# Altium PCB CAN-to-CAN.PcbDoc (part 1 of 2)
Units mil, origin at the board's own origin, x right, y up, seen from the top; angles counter-clockwise.
Board outline 4494 x 3585 mil, 4 copper layers (Top Layer, +5V, GND, Bottom Layer), stack 23.756 mil thick; 112 components, 87 nets, 365 pads, 245 vias.
Unrouted connection lines stored in the file: 3.
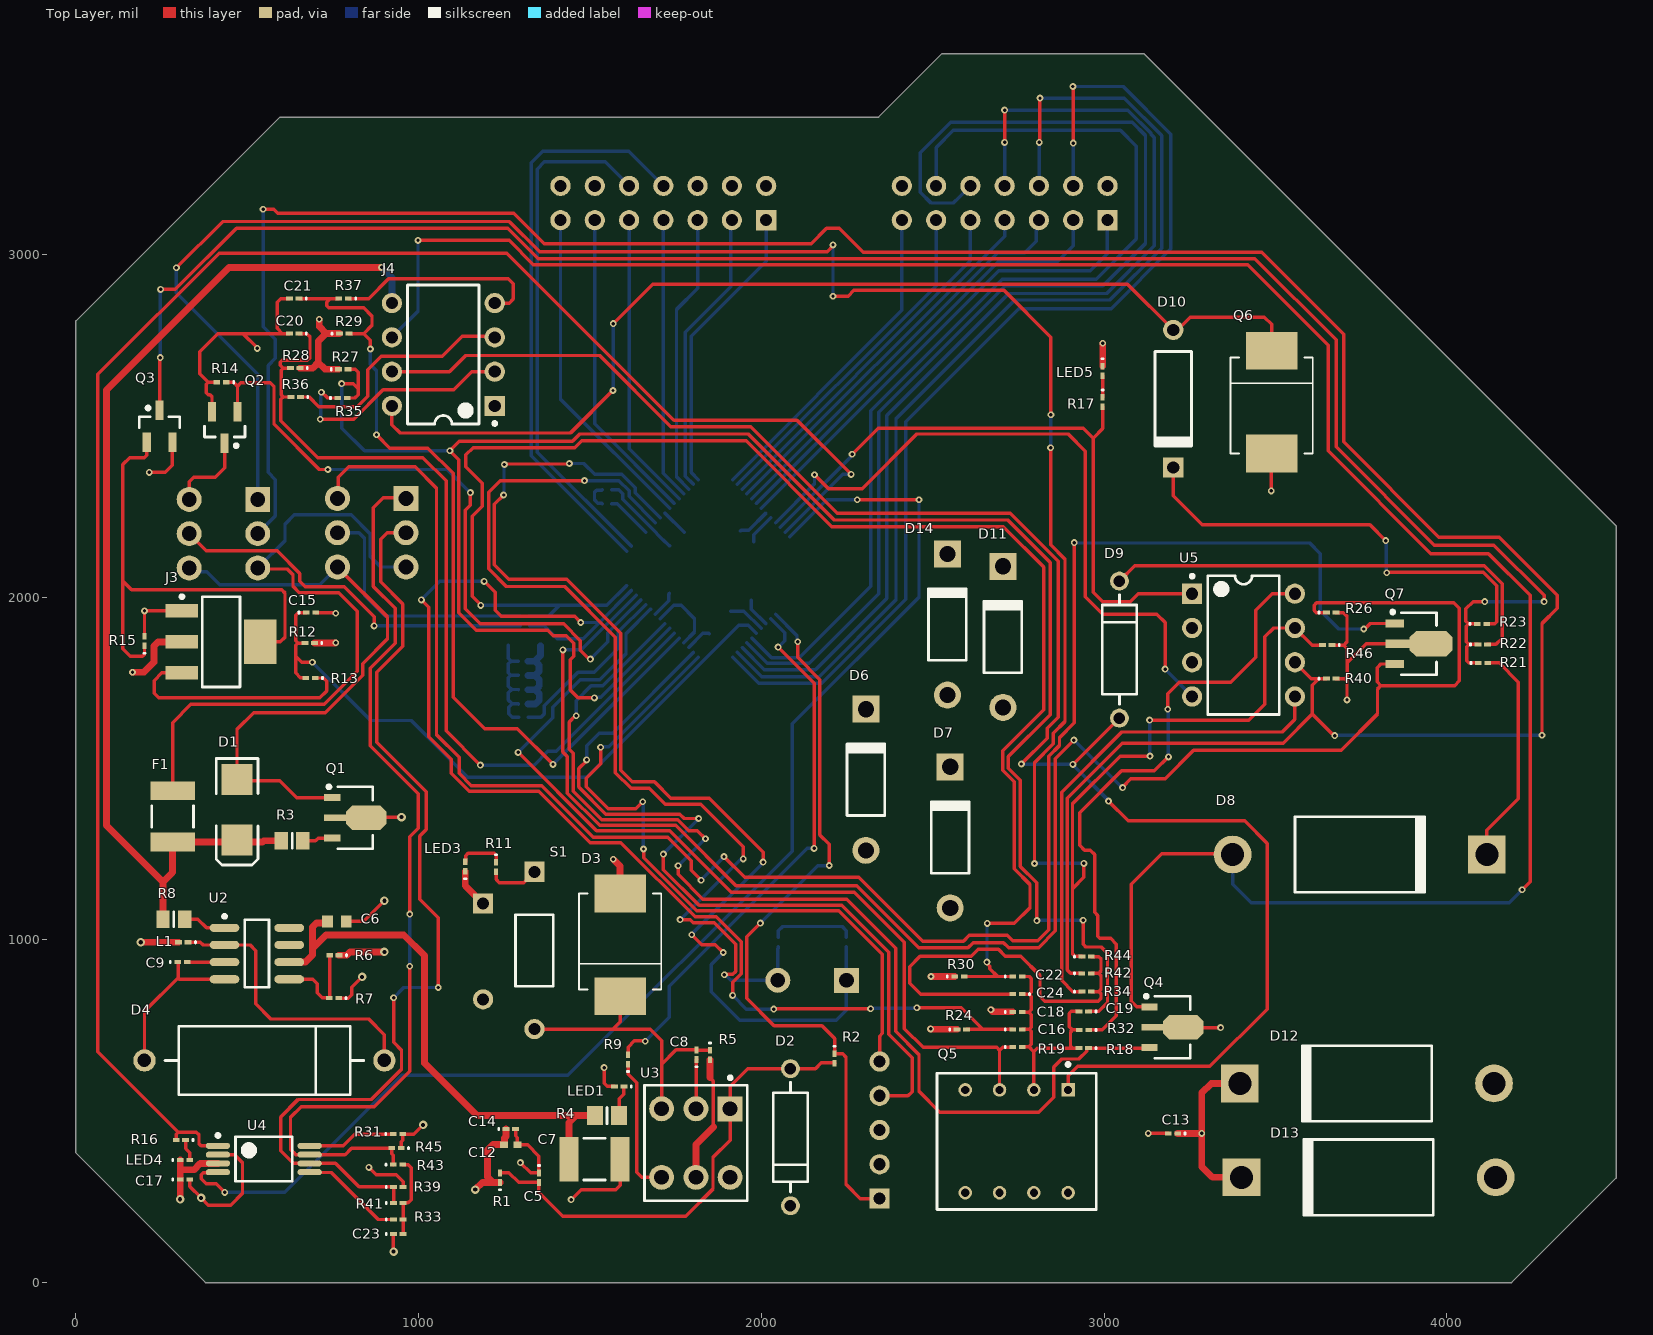
[diagram p0: Top Layer view]
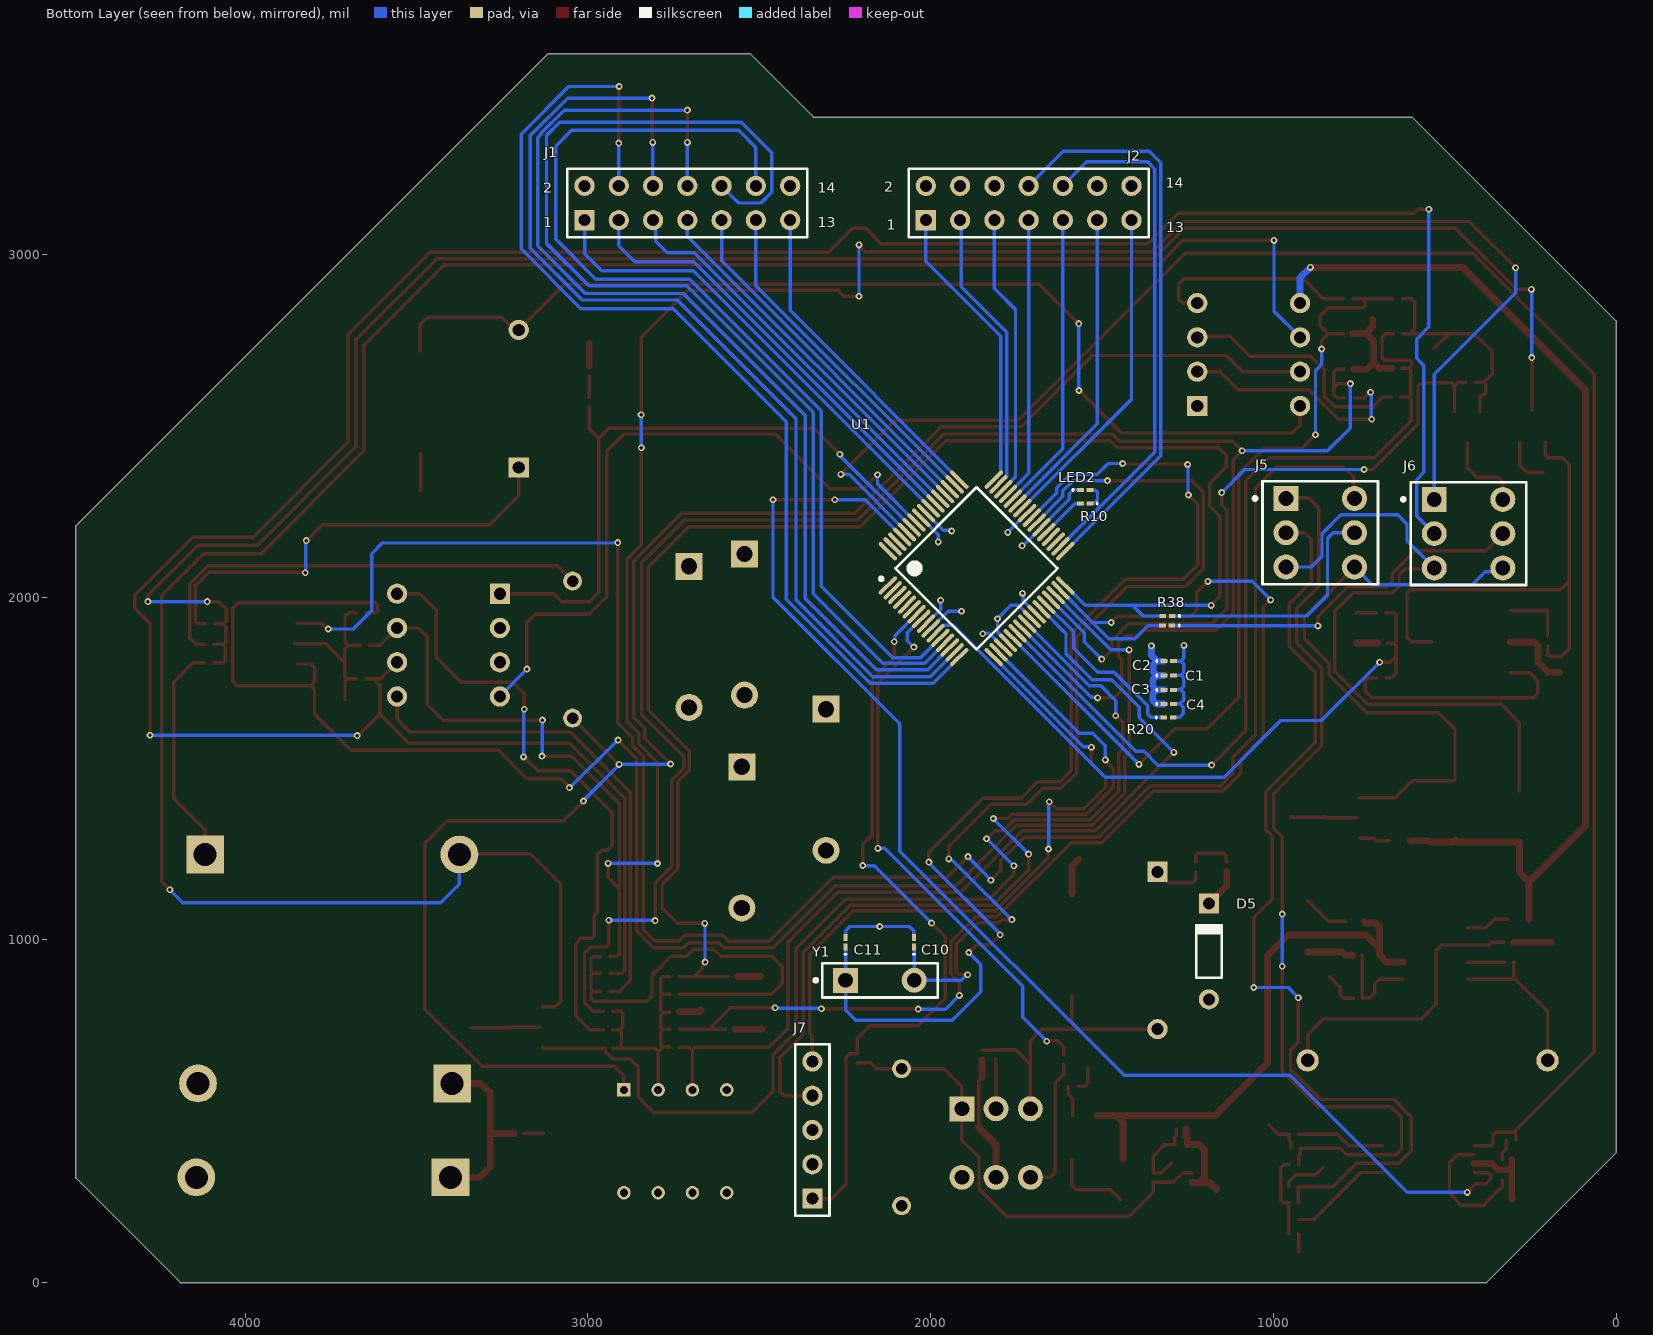
[diagram p1: Bottom Layer view, seen from below]
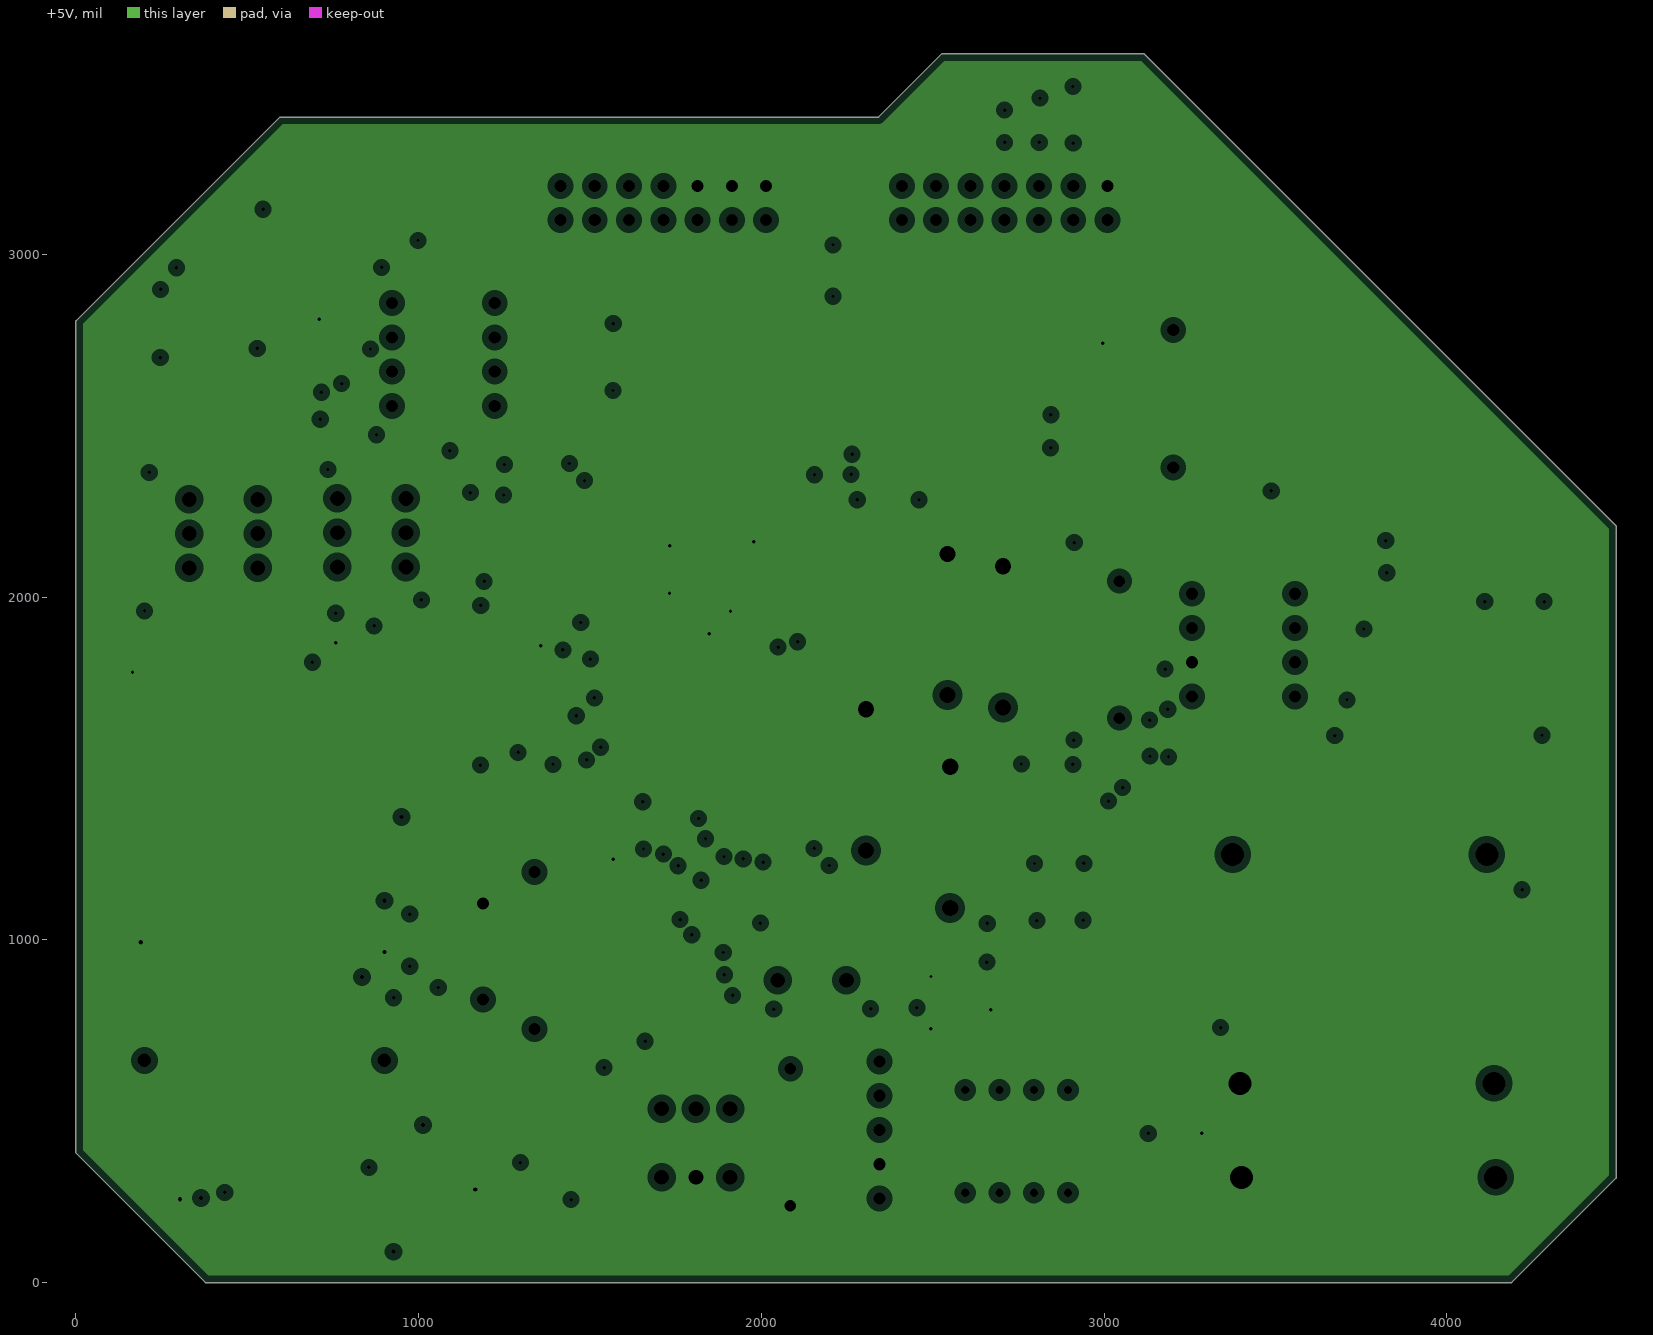
[diagram p2: +5V, clearances drawn from the general rule]
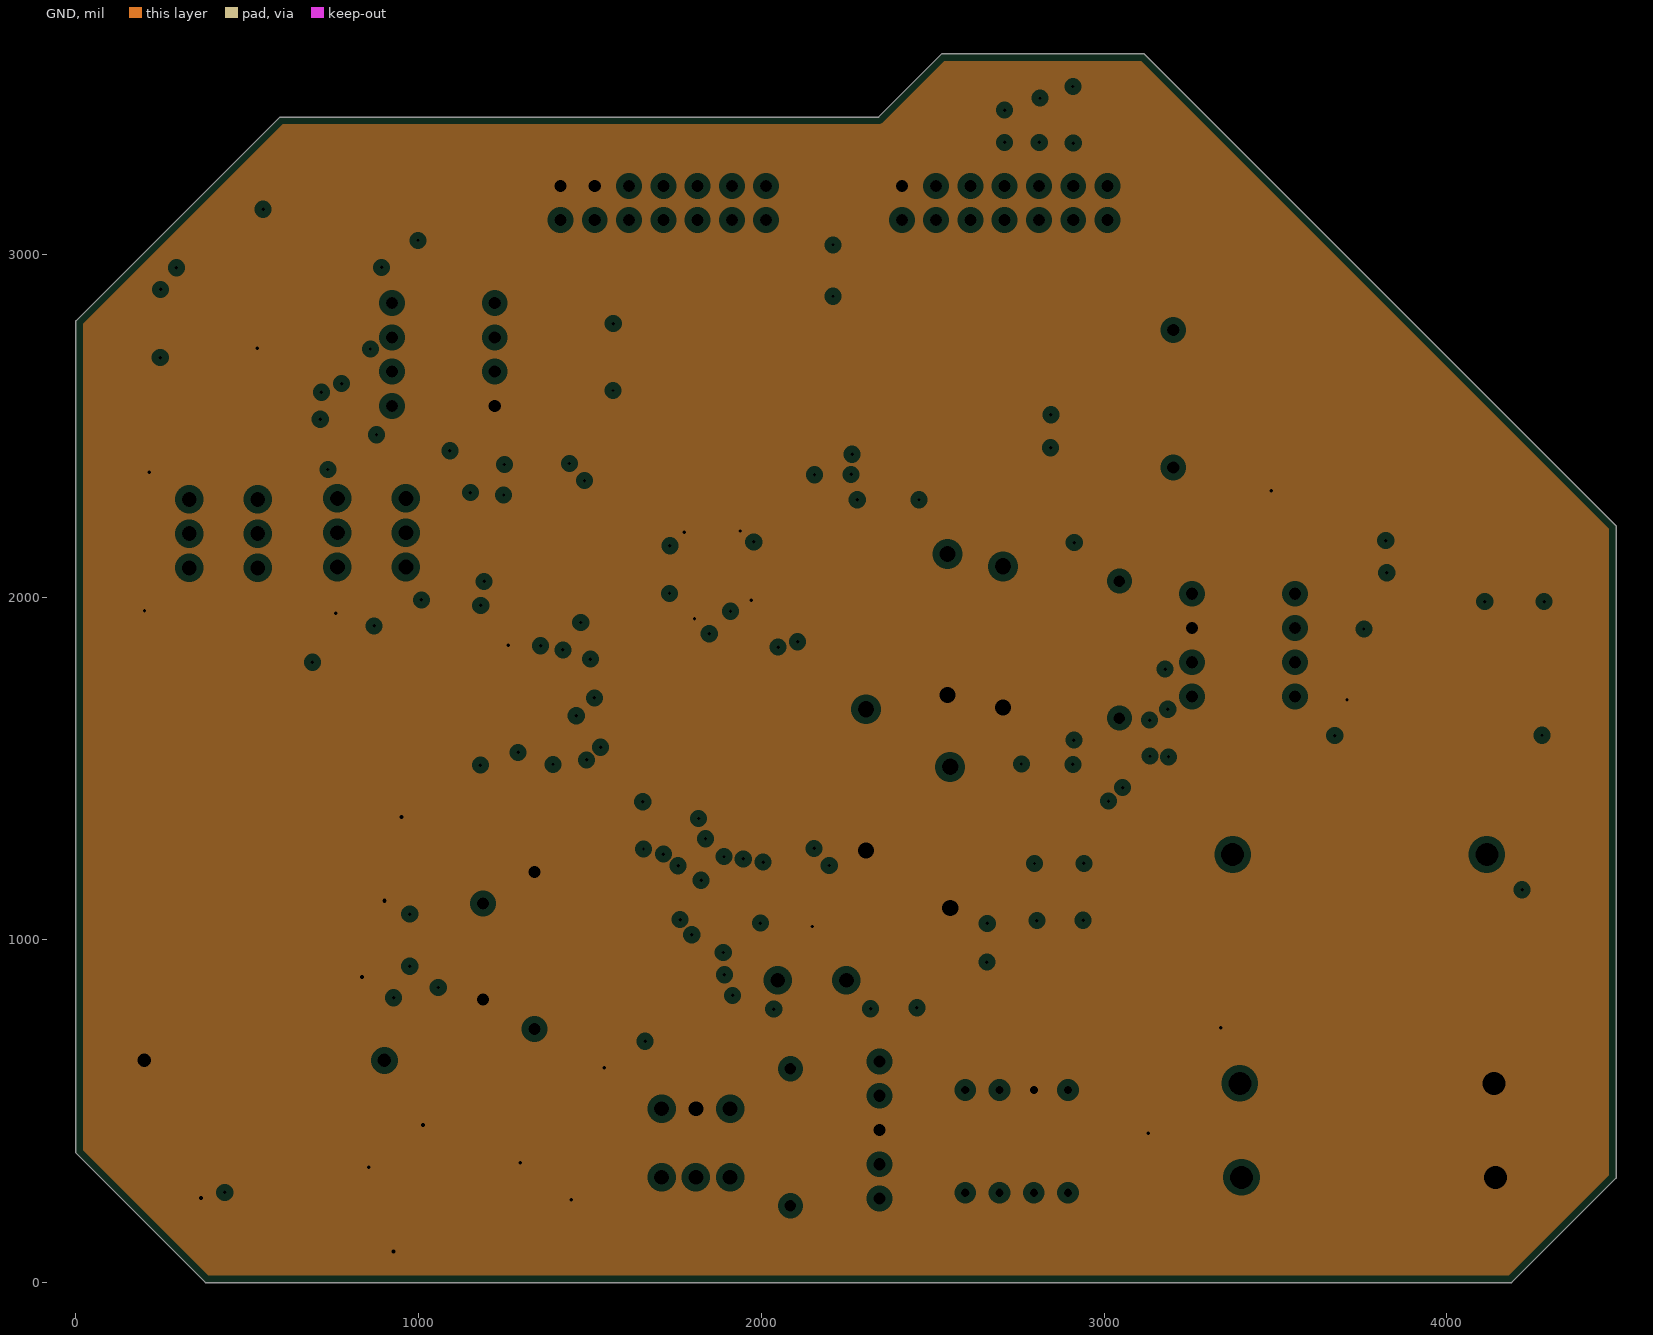
[diagram p3: GND, clearances drawn from the general rule]

## Layer stack, top to bottom
Top Solder: solder mask 0.4, Solder Resist, Dk 3.5
Top Layer: signal copper 1.4
Dielectric 2: prepreg 2.8, PP-006, Dk 4.1
+5V: plane copper 1.378, net +5V
Dielectric 1: dielectric 12.6, FR-4, Dk 4.8
GND: plane copper 1.378, net GND
Dielectric 3: prepreg 2.8, PP-006, Dk 4.1
Bottom Layer: signal copper 1.4
Bottom Solder: solder mask 0.4, Solder Resist, Dk 3.5

## Board outline
378,0 0,378 0,2806 595,3401 2342,3401 2526,3585 3117,3585 3546,3156 4494,2208 4494,305 4189,0

## Design rules (kind name [scope] priority, off if disabled: settings)
Clearance [All] p1: gap=6 ignorepadtopadclearanceinfootprint=FALSE
PlaneClearance [All] p1: clearance=20
PlaneConnect [All] p1: planeconnectstyle=Relief reliefexpansion=20 reliefentries=4 reliefconductorwidth=10 reliefairgap=10
PolygonConnect [All] p1: connectstyle=Relief reliefconductorwidth=10 reliefentries=4 polygonreliefangle="90 Angle" airgapwidth=10
RoutingVias [All] p1: holewidth=12 width=25 viastyle="Through Hole" minholewidth=10 minwidth=20 maxholewidth=25 maxwidth=50
SolderMaskExpansion [All] p1: expansion=4 istentingtop=FALSE
Width [All] p1: maxlimit=20 minlimit=5 preferedwidth=10
28 further rules are at their usual default settings.

## Components (designator, comment, footprint, x,y, rotation, side; value= is the part's Value field where it differs from the comment)
C1 "100n" 0603 1305.22,1771.33 r180 bottom
C2 "100n" 0603 1305.22,1813 r180 bottom
C3 "100n" 0603 1305.22,1729.67 r180 bottom
C4 "100n" 0603 1305.22,1688 r180 bottom
C5 "100n" 0603 1351,306 r270 top
C6 "10u/16" 1608[0603] 761.44,1053 r0 top value=470u/16
C7 "100n" 1812 1513.2,360 r0 top
C8 "10n" 0603 1811,664.78 r90 top value=100pF
C9 "100p" 0603 311,935 r0 top value=100pF
C10 "27p" 0603 2049,993 r90 bottom value=100n
C11 "27p" 0603 2248,993 r90 bottom value=100n
C12 "100u/6V3" 0402 1268.31,402 r0 top value=470u/16
C13 "100n" 0603 3201,435 r180 top
C14 "100n" 0603 1269,448 r0 top
C15 "100n" 0603 686,1955 r0 top
C16 "100n" 0603 2747.53,738.5 r0 top
C17 "100n" 0603 317.97,300 r0 top
C18 "100n" 0603 2747.53,790 r0 top
C19 "100n" 0603 2941,791 r180 top
C20 "100n" 0603 636.94,2769 r180 top
C21 "100n" 0603 637,2871 r180 top
C22 "100n" 0603 2747.53,893 r0 top
C23 "4n7" 0603 940.66,142 r0 top value=100n
C24 "4n7" 0603 2747.22,841.5 r180 top value=100n
D1 "P6SMB15A" SMB 470,1379.58 r270 top
D2 "LL4148" DIODE-0.4 2085,424 r270 top
D3 "LL4448" DIODE_SMC 1588,985 r90 top
D4 "LL5817" DIODE-0.7 550,648 r0 top
D5 "BAT54S" DO-35 1188,966 r90 bottom
D6 "BAT54S" DO-41 2305,1467 r90 top
D7 "BAT54S" DO-204AL 2551,1299 r90 top
D8 "LL4148" DO-201AD 3746,1249 r0 top
D9 "LL4148" DIODE-0.4 3045,1847 r90 top
D10 "LL4148" DO-7 3202,2579 r270 top
D11 "BAT54S" DO-41 2705,1884 r90 top
D12 "BAT54S" DO-201AD 3767,581 r180 top
D13 "BAT54S" DO-201AD 3772,307 r180 top
D14 "BAT54S" DO-41 2543,1920 r90 top
F1 "Fuse 1" 1812 282,1360.2 r270 top
J1 "Header 7X2" HDR2X7 3009.98,3100 r180 bottom
J2 "Header 7X2" HDR2X7 2014,3100 r180 bottom
J3 "MX-43045-0400" SOT223_N 423.42,1869.52 r0 top
J4 "MX-43045-0800" DIP-8 1072,2708 r180 top
J5 "MX-43045-0600" DPDT-6 863,2188 r180 bottom
J6 "MX-43045-0600" DPDT-6 430.44,2185.19 r180 bottom
J7 "ZL201" HDR1X5 2345,245 r90 bottom
L1 "DL22-330" 0603 313.22,993 r180 top value=100uH
LED1 "HCL-1904AYL" 0603 1585.22,572 r180 top
LED2 "HCL-1906BR1" 0603 1549,2313 r180 bottom
LED3 "HCL-1903BG4" 0603 1136,1213.78 r90 top
LED4 "HCL-1904AYL" 0603 317.97,358 r0 top
LED5 "HCL-1906BR1" 0603 2996,2660 r270 top
Q1 "BSS138" SOT89L 815,1356 r0 top
Q2 "BSS123" SOT23_M 434,2495 r270 top
Q3 "BSS123" SOT23_M 244,2498.74 r90 top
Q4 "BSS123" SOT89L 3199.93,745.06 r0 top
Q5 "BSS123" DIP-P8 2745,412 r180 top
Q6 "BSS123" DIODE_SMC 3489,2569 r270 top
Q7 "BSS123" SOT89N 3919,1864 r0 top
R1 "4k7" 0603 1238,306 r90 top value=1K
R2 "4k7" 0603 2214,654 r270 top value=1K
R3 "1M" 6-0805_L 631,1289 r0 top value=1K
R4 "4k7" 6-0805_N 1549.57,487 r0 top value=1K
R5 "10k" 0603 1850,663.78 r270 top value=1K
R6 "3k6 1%" 0603 754,955 r180 top value=1K
R7 "1k2 1%" 0603 752.78,830 r180 top value=1K
R8 "1R" 6-0805_L 285.5,1060 r180 top value=1K
R9 "nc" 0603 1611,651 r90 top value=1K
R10 "1k8" 0603 1549,2273 r0 bottom value=1K
R11 "1k8" 0603 1226,1212.56 r270 top value=1K
R12 "10k" 0603 682.22,1866 r180 top value=1K
R13 "470" 0603 684.22,1764 r180 top value=1K
R14 "4k7" 0603 424.78,2627 r180 top value=1K
R15 "4k7" 0603 200,1872 r90 top value=1K
R16 "4k7" 0603 306.22,416 r180 top value=1K
R17 "4k7" 0603 2996,2569.22 r270 top value=1K
R18 "4k7" 0603 2941,684 r180 top value=1K
R19 "4k7" 0603 2747.53,687 r0 top value=1K
R20 "4k7" 0603 1306,1649 r180 bottom value=1K
R21 "10k" 0603 4106,1808 r0 top value=1K
R22 "10k" 0603 4105,1862 r0 top value=1K
R23 "10k" 0603 4103,1922 r0 top value=1K
R24 "10k" 0603 2585,739 r0 top value=1K
R25 "1k" 0603 1310,1917 r0 bottom value=1K
R26 "4k7" 0603 3662.78,1955 r0 top value=1K
R27 "10k" 0603 780,2665 r0 top value=1K
R28 "10k" 0603 639.78,2668 r180 top value=1K
R29 "10k" 0603 782.84,2769 r0 top value=1K
R30 "10k" 0603 2578,893 r0 top value=1K
R31 "1k" 0603 939.66,433 r0 top value=1K
R32 "1k" 0603 2941.22,737 r180 top value=1K
R33 "nc" 0603 940.66,184 r0 top value=1K
R34 "nc" 0603 2949.22,849 r0 top value=1K
R35 "1k" 0603 778,2581 r0 top value=1K
R36 "1k" 0603 641.22,2584 r180 top value=1K
R37 "1k" 0603 780.78,2871 r180 top value=1K
R38 "1k" 0603 1309,1945 r0 bottom value=1K
R39 "CAN0001" 0603 940.66,279 r0 top
R40 "CAN0001" 0603 3662.78,1762 r0 top
R41 "68" 0603 940.66,232 r0 top value=1K
R42 "68" 0603 2949,902 r0 top value=1K
R43 "68" 0603 940,344 r0 top value=1K
R44 "68" 0603 2949.22,951 r0 top value=1K
R45 "CAN0001" 0603 935.22,392 r180 top
R46 "CAN0001" 0603 3651.03,1860 r180 top
S1 "DTSM32NB" PIN-W2/E2.8 1338,969 r270 top
U1 "PIC30F5011" ST-64-2_N 1866,2084 r135 bottom
U2 "MC33063AD" SO8_N 528,960 r0 top
U3 "MCP1320-46LT" DPDT-6 1809,407 r270 top
U4 "MCP2551-I/SN" DB008_L 548.14,360.39 r0 top
U5 "MCP2551-I/SN" DIP-8 3407,1860 r0 top
Y1 "10MHz" SPST-2 2148,882 r180 bottom

## Footprints (in the part's own frame and the unit in brackets; to place one, negate y for a bottom-side part, rotate by r counter-clockwise, add the part's x,y. Pads: shape width x height; smd on the part's side, far side on the other; paste and mask are expansions set on the pad)
6-0805_L [mm] "Chip Resistor, Body 2.0x1.2mm, IPC High Density"
  rect 1x1.3 smd: 1(-0.8,0) 2(0.8,0)
  silkscreen extent 0,-0.55 0,0.55, body extent -1.07,-0.7 1.07,0.7, height 0.7
6-0805_N [mm] "Chip Resistor, Body 2.0x1.2mm, IPC Medium Density"
  rect 1.2x1.4 smd: 1(-0.9,0) 2(0.9,0)
  silkscreen extent 0,-0.6 0,0.6, body extent -1.07,-0.7 1.07,0.7, height 0.7
0402 [mm] "Chip Capacitor, Body 1.0x0.5mm, IPC High Density"
  rect 0.6x0.5 smd: 1(-0.5,0) 2(0.5,0)
  body extent -0.55,-0.3 0.55,0.3, height 1.3
0603 [mm] "Chip Inductor, Body 0.6x0.3mm, IPC High Density"
  rect 0.5x0.3 smd: 1(-0.35,0) 2(0.35,0)
  silkscreen extent -0.9,-0.05 -0.9,0.05, body extent -0.33,-0.18 0.33,0.18, height 0.55
1608[0603] [mm] "Chip Capacitor, Body 1.6x0.8mm, IPC High Density"
  rect 0.8x0.9 smd: 1(-0.7,0) 2(0.7,0)
  body extent -0.87,-0.48 0.87,0.48, height 1.3
1812 [mm] "Chip Capacitor, Body 4.5x3.2mm, IPC High Density"
  rect 1.4x3.3 smd: 1(-1.9,0) 2(1.9,0)
  silkscreen extent -0.8,-1.55 0.8,1.55, body extent -2.4,-1.7 2.4,1.7, height 1.4
DB008_L [mm] "SOP, 8-Leads, Body 3x5.3mm, Pitch 0.65mm, IPC High Density"
  oval 1.8x0.45 smd: 1(-3.4,0.975) 2(-3.4,0.325) 3(-3.4,-0.325) 4(-3.4,-0.975) 5(3.4,-0.975) 6(3.4,-0.325) 7(3.4,0.325) 8(3.4,0.975)
  silkscreen extent -3.52,-1.65 2.1,1.87, body extent -2.8,-1.65 2.8,1.65, height 2
DIODE-0.4 [mm] "Diode, Thru-Hole; 2 Leads; 0.4 in Pin Spacing"
  round 1.4 hole 0.85: 1(-5.08,0) 2(5.08,0)
  silkscreen extent -4.06,-1.27 4.06,1.27
DIODE-0.7 [mm] "Diode, Thru-Hole; 2 Leads; 0.7 in Pin Spacing"
  round 1.65 hole 1: 1(-8.89,0) 2(8.89,0)
  silkscreen extent -7.37,-2.54 7.37,2.54
DIODE_SMC [mil] "Diode; 2 Leads"
  rect 110x150 smd: 1(-150,0) 2(150,0)
  silkscreen extent -130,-120 150,120
DIP-8 [mm] "DIP; 8 Leads; Row Spacing 7.62 mm; Pitch 2.54 mm"
  rect 1.5x1.5 hole 0.9: 1(-3.81,3.81)
  round 1.5 hole 0.9: 2(-3.81,1.27) 3(-3.81,-1.27) 4(-3.81,-3.81) 5(3.81,-3.81) 6(3.81,-1.27) 7(3.81,1.27) 8(3.81,3.81)
  silkscreen extent -3.94,-5.15 2.65,5.23, body extent -3.6,-5.15 3.6,5.15, height 5.08
DIP-P8 [mm] "Dual-Pole Dual-Throw Relay; 8 Leads"
  rect 1x1 hole 0.6: 1(-3.81,-3.81)
  round 1 hole 0.6: 2(-1.27,-3.81) 3(1.27,-3.81) 4(3.81,-3.81) 5(3.81,3.81) 6(1.27,3.81) 7(-1.27,3.81) 8(-3.81,3.81)
  silkscreen extent -5.9,-5.82 5.9,5.05
DO-7 [mm] "Diode, Axial; Body 7 x 2.7 mm (LxDia. max), Lead Dia. 0.53 mm (max)"
  round 1.5 hole 0.9: 1(-5.1,0)
  rect 1.5x1.5 hole 0.9: 2(5.1,0)
  silkscreen extent -3.5,-1.35 3.6,1.35
DO-35 [mm] "Diode, Axial; Body 3.8 x 1.9 mm (LxDia. max), Lead Dia. 0.53 mm (max)"
  round 1.5 hole 0.9: 1(-3.55,0)
  rect 1.5x1.5 hole 0.9: 2(3.55,0)
  silkscreen extent -1.95,-0.95 2.05,0.95
DO-41 [mm] "Diode, Axial; Body 5.2 x 2.7 mm (LxDia. max), Lead Dia. 0.86 mm (max)"
  round 2 hole 1.2: 1(-5.23,0)
  rect 2x2 hole 1.2: 2(5.23,0)
  silkscreen extent -2.65,-1.4 2.75,1.4
DO-201AD [mm] "Diode, Axial; Body 9.5 x 5.6 mm (LxDia. max), Lead Dia. 1.32 mm (max)"
  round 2.8 hole 1.7: 1(-9.42,0)
  rect 2.8x2.8 hole 1.7: 2(9.42,0)
  silkscreen extent -4.8,-2.8 4.9,2.8
DO-204AL [mm] "Diode, Axial; Body 5.2 x 2.7 mm (LxDia. max), Lead Dia. 0.86 mm (max)"
  round 2 hole 1.2: 1(-5.23,0)
  rect 2x2 hole 1.2: 2(5.23,0)
  silkscreen extent -2.65,-1.4 2.75,1.4
DPDT-6 [mm] "Switch; 6 Leads"
  rect 1.85x1.85 hole 1.1: 1(-2.54,2.54)
  round 1.85 hole 1.1: 2(-2.54,0) 3(-2.54,-2.54) 4(2.54,-2.54) 5(2.54,0) 6(2.54,2.54)
  silkscreen extent -4.96,-3.81 4.28,3.81
HDR1X5 [mm] "Connector; Header; 5 Position"
  rect 1.5x1.5 hole 0.9: 1(0,0)
  round 1.5 hole 0.9: 2(2.54,0) 3(5.08,0) 4(7.62,0) 5(10.16,0)
  silkscreen extent -1.27,-1.27 11.43,1.27
HDR2X7 [mm] "Connector; Header; 7x2 Position"
  rect 1.5x1.5 hole 0.9: 1(0,0)
  round 1.5 hole 0.9: 2(0,2.54) 3(2.54,0) 4(2.54,2.54) 5(5.08,0) 6(5.08,2.54) 7(7.62,0) 8(7.62,2.54) 9(10.16,0) 10(10.16,2.54) 11(12.7,0) 12(12.7,2.54) 13(15.24,0) 14(15.24,2.54)
  silkscreen extent -1.27,-1.27 16.51,3.81
PIN-W2/E2.8 [mm] "Thru-Hole; 2 Leads"
  rect 1.5x1.5 hole 0.9: 1(-5.825,0)
  round 1.5 hole 0.9: 2(5.825,0)
  silkscreen extent -2.65,-1.4 2.65,1.4
SMB [mm] "DO-214-AA/SMB; 2 C-Bend Leads; Body 5.3 x 3.6 mm, inc. leads (LxW)"
  rect 2.3x2.3 smd: 1(-2.25,0) 2(2.25,0)
  silkscreen extent -3.8,-1.55 4.1,1.55
SO8_N [mm] "SOIC, 8-Leads, Body 4.9x3.9mm, Pitch 1.27mm, IPC Medium Density"
  oval 2.2x0.6 smd: 1(-2.4,1.905) 2(-2.4,0.635) 3(-2.4,-0.635) 4(-2.4,-1.905) 5(2.4,-1.905) 6(2.4,-0.635) 7(2.4,0.635) 8(2.4,1.905)
  silkscreen extent -2.52,-2.5 0.9,2.88, body extent -2,-2.5 2,2.5, height 1.75
SOT23_M [mm] "SOT23, 3-Leads, Body 2.9x1.3mm, Pitch 0.95mm, Lead Span 2.3mm - Reverse Pinning, IPC Low Density"
  rect 1.45x0.6 smd: 1(1.175,0) 2(-1.175,-0.95) 3(-1.175,0.95)
  silkscreen extent -0.1,-1.5 1.47,1.5, body extent -0.7,-1.5 0.7,1.5, height 1.1
SOT89L [mm] "SOT89, 3-Leads, Body 4.5x2.4 mm, Pitch 1.5mm, Lead Span 4.1mm, IPC High Density"
  rect 1.2x0.5 smd: 1(-1.7,1.5) 3(-1.7,-1.5)
  rect 1.6x0.5 smd: 2(-1.5,0)
  oct 3x1.8 smd: 2(0.8,0)
  silkscreen extent -2.07,-2.3 1.3,2.42, body extent -1.3,-2.3 1.3,2.3, height 1.6
SOT89N [mm] "SOT89, 3-Leads, Body 4.5x2.4 mm, Pitch 1.5mm, Lead Span 4.1mm, IPC Medium Density"
  rect 1.4x0.6 smd: 1(-1.8,1.5) 3(-1.8,-1.5)
  rect 1.8x0.6 smd: 2(-1.6,0)
  oct 3.2x1.9 smd: 2(0.9,0)
  silkscreen extent -2.07,-2.3 1.3,2.47, body extent -1.3,-2.3 1.3,2.3, height 1.6
SOT223_N [mm] "SOT223, 4-Leads, Body 6.5x3.5mm, Pitch 2.3mm, Lead Span 7mm, IPC Medium Density"
  rect 2.4x1 smd: 1(-2.9,2.3) 2(-2.9,0) 3(-2.9,-2.3)
  rect 2.4x3.3 smd: 4(2.9,0)
  silkscreen extent -3.02,-3.35 1.4,3.47, body extent -1.85,-3.35 1.85,3.35, height 1.7
SPST-2 [mm] "Switch; 2 Leads"
  rect 1.85x1.85 hole 1.1: 1(-2.54,0)
  round 1.85 hole 1.1: 2(2.54,0)
  silkscreen extent -4.89,-1.27 4.28,1.27
ST-64-2_N [mm] "Thin QFP, 64-Leads, Body 10x10mm, Pitch 0.5mm, IPC Medium Density"
  oval 1.8x0.3 smd: 1(-5.55,3.75) 2(-5.55,3.25) 3(-5.55,2.75) 4(-5.55,2.25) 5(-5.55,1.75) 6(-5.55,1.25) 7(-5.55,0.75) 8(-5.55,0.25) 9(-5.55,-0.25) 10(-5.55,-0.75) 11(-5.55,-1.25) 12(-5.55,-1.75) 13(-5.55,-2.25) 14(-5.55,-2.75) 15(-5.55,-3.25) 16(-5.55,-3.75) 33(5.55,-3.75) 34(5.55,-3.25) 35(5.55,-2.75) 36(5.55,-2.25) 37(5.55,-1.75) 38(5.55,-1.25) 39(5.55,-0.75) 40(5.55,-0.25) 41(5.55,0.25) 42(5.55,0.75) 43(5.55,1.25) 44(5.55,1.75) 45(5.55,2.25) 46(5.55,2.75) 47(5.55,3.25) 48(5.55,3.75)
  oval 0.3x1.8 smd: 17(-3.75,-5.55) 18(-3.25,-5.55) 19(-2.75,-5.55) 20(-2.25,-5.55) 21(-1.75,-5.55) 22(-1.25,-5.55) 23(-0.75,-5.55) 24(-0.25,-5.55) 25(0.25,-5.55) 26(0.75,-5.55) 27(1.25,-5.55) 28(1.75,-5.55) 29(2.25,-5.55) 30(2.75,-5.55) 31(3.25,-5.55) 32(3.75,-5.55) 49(3.75,5.55) 50(3.25,5.55) 51(2.75,5.55) 52(2.25,5.55) 53(1.75,5.55) 54(1.25,5.55) 55(0.75,5.55) 56(0.25,5.55) 57(-0.25,5.55) 58(-0.75,5.55) 59(-1.25,5.55) 60(-1.75,5.55) 61(-2.25,5.55) 62(-2.75,5.55) 63(-3.25,5.55) 64(-3.75,5.55)
  silkscreen extent -5.67,-4.25 4.25,4.57, body extent -5,-5 5,5, height 1.6

## Part data
C1 C2 C3 C4 C5 C7 C8 C9 C10 C11 C13 C14 C15 C16 C17 C18 C19 C20 C21 C22 C23 C24: library part Cap, "Capacitor", LatestRevisionDate=17-Jul-2002, LatestRevisionNote="Re-released for DXP Platform.", PackageReference=RAD-0.3, Published=8-Jun-2000, Publisher="Altium Limited"
C6 C12: library part "Cap Pol1", "Polarized Capacitor (Radial)", LatestRevisionDate=17-Jul-2002, LatestRevisionNote="Re-released for DXP Platform.", PackageReference=RB7.6-15, Published=8-Jun-2000, Publisher="Altium Limited"
D1: library part "D Zener", "Zener Diode", LatestRevisionDate=17-Jul-2002, LatestRevisionNote="Re-released for DXP Platform.", PackageReference=DIODE-0.7, Published=8-Jun-2000, Publisher="Altium Limited"
D2 D4 D8 D9 D10: library part 1N4148, "High Conductance Fast Diode", Code_JEDEC=DO-204-AH, ComponentLink1Description="Manufacturer Link", ComponentLink1URL=http://www.fairchildsemi.com/, ComponentLink2Description=Datasheet, ComponentLink2URL=http://www.fairchildsemi.com/ds/1N%2F1N4148.pdf, DatasheetDocument=1997, LatestRevisionDate=17-Jul-2002, LatestRevisionNote="Re-released for DXP Platform.", PackageReference=DO-35, Published=8-Jun-2000, Publisher="Altium Limited"
D3: library part Diode, "Default Diode", PackageDocument=Sep-1996, Code_JEDEC=DO-214-AB, LatestRevisionDate=17-Jul-2002, LatestRevisionNote="Re-released for DXP Platform.", PackageReference=SMC, Published=8-Jun-2000, Publisher="Altium Limited"
D5 D6 D7 D11 D12 D13 D14: "Schottky Barrier Double Diode", ComponentLink1Description="Manufacturer Link", ComponentLink1URL=http://www.semiconductors.philips.com/, ComponentLink2Description=Datasheet, ComponentLink2URL=http://www.semiconductors.philips.com/acrobat/datasheets/BAT54_SERIES_4.pdf, DatasheetVersion=4-Mar-2002, LatestRevisionDate=12-Dec-2006, LatestRevisionNote="IPC-7351 Footprint Added.", PackageDescription="3-Pin SOT-23 Package 0.95 mm Pitch, 2.3 mm Lead Span", PackageReference=SOT23, PackageVersion=May-1999, Published=17-Sep-2003, Publisher="Altium Limited"
F1: "Fuse", LatestRevisionDate=17-Jul-2002, LatestRevisionNote="Re-released for DXP Platform.", PackageReference=PIN-W2/E2.8, Published=8-Jun-2000, Publisher="Altium Limited"
J1 J2: "Header, 7-Pin, Dual row", LatestRevisionDate=17-Jul-2002, LatestRevisionNote="Re-released for DXP Platform.", Publisher="Altium Limited"
J3: library part "Header 2X2", "Header, 2-Pin, Dual row", LatestRevisionDate=17-Jul-2002, LatestRevisionNote="Re-released for DXP Platform.", Publisher="Altium Limited"
J4: library part "Header 4X2A", "Header, 4-Pin, Dual row", LatestRevisionDate=17-Jul-2002, LatestRevisionNote="Re-released for DXP Platform.", Publisher="Altium Limited"
J5 J6: library part "Header 6", "Header, 6-Pin", LatestRevisionDate=17-Jul-2002, LatestRevisionNote="Re-released for DXP Platform.", Publisher="Altium Limited"
J7: library part CON5, "Connector"
L1: library part "Inductor Iron", "Magnetic-Core Inductor", Published=24-Mar-1999, Publisher="Altium Limited", Revision="July-2002: Re-released for DXP Platform."
LED1 LED2 LED3 LED4 LED5: library part LED3, "Typical BLUE SiC LED", Published=8-Jun-2000, Publisher="Altium Limited", Revision 1="Jul-2002: Re-released for DXP Platform.", Revision 2="17-Dec-2003: PCB Footprint replaced."
Q1: "N-Channel Enhancement Mode Vertical DMOS FET", ComponentLink1Description="Manufacturer Link", ComponentLink1URL=http://www.zetex.com/, ComponentLink2Description=Datasheet, ComponentLink2URL=www.zetex.com/3.0/pdf/BSS138.pdf, DatasheetVersion=Mar-96, PackageDescription="SOT-23; 3 Leads; Body 3.1 x 2.5 mm, inc. leads (LxW max), Alternate Lead Configuration", PackageReference=SOT23, PackageVersion=1996, Published=17-Dec-2003, Publisher="Altium Limited"
Q2 Q3 Q4 Q5 Q6 Q7: "N-channel Enhancement Mode Vertical D-MOSFET", ComponentLink1Description="Manufacturer Link", ComponentLink1URL=http://www.semiconductors.philips.com/, ComponentLink2Description=Datasheet, ComponentLink2URL=http://www.semiconductors.philips.com/acrobat/datasheets/BSS123_3.pdf, DatasheetVersion=Apr-1995, LatestRevisionDate=12-Dec-2006, LatestRevisionNote="IPC-7351 Footprint Added.", PackageDescription="3-Pin SOT-23 Package 0.95 mm Pitch, 2.3 mm Lead Span", PackageReference=SOT23, PackageVersion=May-1999, Published=17-Sep-2003, Publisher="Altium Limited"
R1 R2 R3 R4 R5 R6 R7 R8 R9 R10 R11 R12 R13 R14 R15 R16 R17 R18 R19 R20 R21 R22 R23 R24 R25 R26 R27 R28 R29 R30 R31 R32 R33 R34 R35 R36 R37 R38 R41 R42 R43 R44: library part Res2, "Resistor", LatestRevisionDate=17-Jul-2002, LatestRevisionNote="Re-released for DXP Platform.", PackageReference=AXIAL-0.4, Published=8-Jun-2000, Publisher="Altium Limited"
R39 R40 R45 R46: library part "Res Varistor", "Varistor (Voltage-Sensitive Resistor)", LatestRevisionDate=04-Mar-2005, LatestRevisionNote="PCB Footprint replaced.", PackageReference=6-0805, Published=24-Mar-1999, Publisher="Altium Limited"
S1: library part PUSHB, "Switch PushButton"
U1: "PIC30F5011 - Up"
U2: "DC-to-DC Converter Control Circuit", Code_IPC=SOIC127P600-8, Code_JEDEC=MS-012-AA, ComponentLink1Description="Manufacturer Link", ComponentLink1URL=http://www.onsemi.com/site/products/taxonomy/0,4438,503,00.html, ComponentLink2Description=Datasheet, ComponentLink2URL=http://www.onsemi.com/pub/Collateral/MC34063A-D.PDF, DatasheetVersion=1988, LatestRevisionDate=13-Apr-2006, LatestRevisionNote="IPC-7351 Footprint Added.", PackageDescription="8-Pin Small Outline Integrated Circuit 1.27 mm Pitch", PackageReference=751-02, Published=17-Jul-2002, Publisher="Altium Limited"
U3: library part MCP1320
U4 U5: "High Speed CAN Transceiver, 8-Pin Plastic SOIC, Industrial Grade", Code_JEDEC=MS-012, ComponentLink1Description="Manufacturer Link", ComponentLink1URL=http://www.microchip.com, ComponentLink2Description=Datasheet, ComponentLink2URL=http://ww1.microchip.com/downloads/en/DeviceDoc/21667d.pdf, DatasheetVersion=Nov-2003, LatestRevisionDate=13-Apr-2006, LatestRevisionNote="IPC-7351 Footprint Added.", PackageDescription="8-Pin Plastic Narrow Body Small Outline Integrated Circuit 1.27 mm Pitch", PackageReference=SOIC150-8, PackageVersion=Oct-2005, Published=6-Oct-2005, Publisher="Altium Limited"
Y1: library part XTAL, "Crystal Oscillator", LatestRevisionDate=17-Jul-2002, LatestRevisionNote="Re-released for DXP Platform.", PackageReference=R38, Published=8-Jun-2000, Publisher="Altium Limited"

## Via types
v1: diameter 20, hole 10, Top Layer to GND, 110 vias
v2: diameter 20, hole 10, GND to Bottom Layer, 104 vias
v3: diameter 20, hole 10, Top Layer to +5V, 9 vias
v4: diameter 20, hole 10, +5V to Bottom Layer, 6 vias
v5: diameter 25, hole 12, Top Layer to GND, 6 vias
v6: diameter 20, hole 10, Top Layer to Bottom Layer, 6 vias
v7: diameter 25, hole 12, Top Layer to +5V, 4 vias

## Nets (pads, with @x,y where several pads share a name; then routed paths per layer and width w, separated by ;. In a path a pad name is that pad's centre, name@x,y a point inside that pad or via, vN(x,y) a via of type N, cw(c..) or ccw(c..) an arc to the next point about the centre after c; other vN are vias at no path point)
+5V: C1.1 C2.1 C3.1 C4.1 C12.1 C13.1 C14.1 C17.1 C18.1 D2.2 D3.2 D5.2 D6.2 D7.2 D11.2 D12.2 D13.2 D14.2 J1.2 J2.2 J2.4 J2.6 J3.2 J7.2 L1.2 LED2.1 LED3.1 LED4.1 LED5.1 R1.1 R5.2 R6.1 R12.1 R24.1 R27.1 R28.1 R29.1 R30.1 U1.10 U1.19 U1.26 U1.38 U1.57 U3.5 U4.3 U5.3 | length 3652.3
  Top Layer w10: 1850,598 1860,588 1860,454
  Top Layer w20: v3(165,1781) 199,1781 228,1810 228,1857.8 239.72,1869.52 J3.2 ; v7(189,993) L1.2 ; v7(304,243) 304.19,243.19 C17.1 304.19,329 ; LED4.1 304.19,329 ; U4.3 362.59,347.59 344,329 304.19,329 ; R28.1 691,2668 707,2684 ; R12.1 757,1866 v3(758,1867) ; v3(710,2811) 710,2789 730,2769 ; R27.1 726,2665 707,2684 ; R6.1 790,955 800,965 v7(900,965) ; R29.1 730,2769 ; LED3.1 1136,1157.76 D5.2 ; v7(1165,271) 1186.22,292.22 1216.78,292.22 ; R1.1 1216.78,292.22 ; C14.1 1255.22,426.22 1250.44,421.44 1250.44,402.16 1250.28,402 C12.1 1247.63,403 1217,403 1201,387 1201,308 1216.78,292.22 ; v3(1568,1235) 1588,1215 D3.2 ; U3.5 1809,403 1860,454 ; 1850,598 R5.2 ; v3(2494,740) 2495,739 R24.1 ; v3(2495,893) R30.1 ; v3(2670,796) 2676,790 C18.1 ; LED5.1 v3(2996,2741) ; C13.1 v3(3285,435) ; D12.2 3313,581 3285,553 v3(3285,435) ; D13.2 3317,307 3285,339 v3(3285,435) ; 707,2684 707,2746 730,2769
  Bottom Layer w10: LED2.1 1584,2313 1595,2302 1595,2285.4 U1.38 1712.4,2168 1713,2168 1731,2150 v4(1733,2150) ; U1.26 1730.09,1989.85 1730.09,2009.09 v4(1732,2011) ; U1.19 1829.11,1894 1847,1894 v4(1848,1893) ; v4(1910,1959) 1949.24,1959 U1.10 ; v4(1978,2161) 1977.92,2161.08 1977.92,2182 U1.57
  Bottom Layer w20: C4.1 1340.28,1688 1352,1699.72 1352,1717.95 1340.28,1729.67 ; C3.1 1340.28,1729.67 ; C1.1 1339.28,1771.33 ; C2.1 1339.28,1813 ; v4(1356,1858) 1356,1829.72 1339.28,1813 ; 1339.28,1771.33 1352,1758.62 1352,1741.38 1340.28,1729.67 ; 1339.28,1771.33 1351,1783.05 1351,1801.28 1339.28,1813
+12V: C6.1 C7.1 D1.2 F1.2 J4.5 R3.1 R4.1 R8.2 U2.6 | length 4718.8
  Top Layer w20: R8.2 254.01,1169.01 ; R3.1 548,1289 544,1285 476,1285 D1.2 464.39,1285.39 F1.2 282,1197 254.01,1169.01 ; U2.6 623.18,935.69 670.13,935.69 690,955.57 690,975 ; C6.1 730.16,1049.28 701.72,1049.28 690,1037.56 690,975 ; v1(892,2962) 447,2962 89,2604 89,1334.02 254.01,1169.01 ; C7.1 1438.39,466.39 1459,487 ; R4.1 1459,487 ; 690,975 729.5,1014.5 956.5,1014.5 1017,954 1017,640 1170,487 1459,487
  Bottom Layer w20: v1(892,2962) 922,2932 J4.5
  other v2: 892,2962
+12VPWR: F1.1 J5.3 J6.3 | length 1963.9
  Top Layer w10: F1.1 282,1634 335,1687 724,1687 821,1784 821,1959 767,2013 652,2013 633.25,2031.75 633.25,2064.75 616,2082 533.63,2082 J6.3
  Bottom Layer w10: J6.3 610,2164.75 610,2213 637,2240 803,2240 858,2185 858,2119 889,2088 J5.3
ADC0: J1.4 U1.16 | length 3107.7
  Top Layer w10: v6(2909,3490) 2909.5,3489.5 2909.5,3325.5 v6(2910,3325)
  Bottom Layer w10: U1.16 1992.21,1749 2176,1749 2421,1994 2421,2512 2751,2842 3021,2842 3195,3016 3195,3351 3056,3490 v6(2909,3490) ; J1.4 v6(2910,3325)
ADC1: J1.6 U1.15 | length 3080.9
  Top Layer w10: v6(2811,3327) 2812,3328 2812,3455 v6(2813,3456)
  Bottom Layer w10: U1.15 2001.05,1768 2169,1768 2393,1992 2393,2520 2740,2867 3017,2867 3168,3018 3168,3347 3059,3456 v6(2813,3456) ; J1.6 2810.49,3200.51 2810.49,3326.49 v6(2811,3327)
ADC2: J1.8 U1.14 | length 3063.9
  Top Layer w10: v6(2710,3327) v6(2710,3421)
  Bottom Layer w10: U1.14 2008.89,1788 2158,1788 2366,1996 2366,2530 2722,2886 3008,2886 3147,3025 3147,3341.14 3137,3351.14 3137,3353.77 3069.77,3421 v6(2710,3421) ; J1.8 v6(2710,3327)
ADC3: J1.10 U1.13 | length 3325.9
  Bottom Layer w10: U1.13 2017.72,1807 2140,1807 2343,2010 2343,2539 2712,2908 2997,2908 3121,3032 3121,3347.14 3082.14,3386 2553,3386 2464,3297 2464,3181 2495,3150 2560.14,3150 2577.05,3166.91 2577.05,3167.07 J1.10
ADC4: J1.12 U1.12 | length 2959
  Bottom Layer w10: U1.12 2029.56,1823 2110,1823 2319,2032 2319,2544 2703,2928 2977,2928 3094,3045 3094,3316 3048,3362 2560,3362 2509.98,3311.98 J1.12
ButD: C19.1 R27.2 R35.2 U1.23 | length 5599.1
  Top Layer w10: v2(775,2623) 809,2623 824,2608 ; R35.2 814,2581 824,2591 824,2608 ; R27.2 815,2665 824,2656 824,2608 ; v2(1513,1706) 1465,1706 1442,1729 1442,1817 1453,1828 1453,1865 1431,1887 1393,1887 1377,1903 1168,1903 1117,1954 1117,2401 v2(1091,2427) 1119,2455 1449,2455 1470,2476 1962,2476 2213,2225 2719,2225 2843,2101 2843,1657 2721,1535 2721,1501 2756,1466 2756,1214 2804,1166 v2(2804,1056) ; v1(2939,1057) 2939,986.86 2946.86,979 2992,979 3010,961 3010,817 2984,791 C19.1
  Bottom Layer w10: v2(775,2623) 776,2622 776,2493 842,2427 v2(1091,2427) ; v2(1513,1706) 1514.91,1707.91 1531.67,1707.91 U1.23 ; v2(2804,1056) 2805,1057 v1(2939,1057)
  other v1: 2804,1056 1513,1706 1091,2427 775,2623
  other v2: 2939,1057
ButD_IN: J4.2 R35.1 | length 702.1
  Top Layer w10: v1(713,2519) 810,2519 896,2605 1102,2605 1155,2658 J4.2 ; v2(716,2598) 717.36,2598 734.36,2581 R35.1
  Bottom Layer w10: v1(713,2519) 714.5,2520.5 714.5,2596.5 v2(716,2598)
  other v1: 716,2598
  other v2: 713,2519
ButN: C20.1 R28.2 R36.2 U1.22 | length 2566.3
  Top Layer w10: R28.2 604.56,2668 ; R36.2 604.56,2584 ; C20.1 674,2769 683,2760 683,2699 674.78,2690.78 601.78,2690.78 595.92,2684.92 595.92,2676.64 604.56,2668 ; v1(1180,1510) 1080,1610 1080,2339 1012,2407 706,2407 598,2515 598,2577.44 604.56,2584 ; 604.56,2584 598.71,2589.86 598.71,2662.14 604.56,2668
  Bottom Layer w10: v1(1180,1510) 1337,1510 1377,1550 1401.6,1550 U1.22
  other v2: 1180,1510
ButN_IN: J4.3 R36.1 | length 709.9
  Top Layer w10: R36.1 681,2584 709,2556 821,2556 851.38,2586.38 851.38,2663.38 890.85,2702.85 1069.21,2702.85 1127.36,2761 1219,2761 J4.3
ButR: C21.1 R29.2 R37.2 U1.21 | length 2517.7
  Top Layer w10: C21.1 742,2871 ; R37.2 742,2871 ; R29.2 840,2769 ; v1(859,2724) 859,2750 840,2769 ; v2(877,2474) 916,2435 1027,2435 1101,2361 1101,1708 1193,1616 1288,1616 v1(1392,1512) ; 742,2871 732,2861 732,2849.86 737.86,2844 840,2844 863.86,2820.14 863.86,2792.86 840,2769
  Bottom Layer w10: v1(859,2724) 859,2679 877,2661 v2(877,2474) ; v1(1392,1512) 1392,1512.28 1760.21,1880.49 U1.21
  other v1: 877,2474
  other v2: 1392,1512 859,2724
ButR_IN: J4.4 R37.1 | length 615.2
  Top Layer w10: R37.1 854,2871 912,2929 1262,2929 1276,2915 1276,2870 1264,2858 J4.4
CAN_BMS_RX: U1.58 U5.4 | length 2018.2
  Top Layer w10: v2(2155,2357) 2196,2316 2294,2316 2454,2476 2895,2476 2945.5,2425.5 2945.5,2000.5 2996,1950 3154,1950 3178,1926 v2(3178,1790)
  Bottom Layer w10: U1.58 2155,2331.24 v2(2155,2357) ; v2(3178,1790) 3178,1789 U5.4
  other v1: 3178,1790 2155,2357
CAN_BMS_TX: R17.2 U1.59 U5.1 | length 1910.2
  Top Layer w10: v1(2265,2417) 2341,2493 2939,2493 2968,2464 ; R17.2 2996,2492 2968,2464 ; U5.1 3100,2010 3076,1986 2996,1986 2968,2014 2968,2464
  Bottom Layer w10: U1.59 2263.09,2411.49 2263.09,2415.09 v1(2265,2417)
  other v2: 2265,2417
CAN_BMSS_H: J6.1 R44.1 R46.2 U5.7 | length 7073
  Top Layer w10: v2(293,2961) 428,3096 1265,3096 1353,3008 2192,3008 2209,3025 v1(2209,3028) ; v2(2209,2878) 2253,2878 2270,2895 2708,2895 2845,2758 v1(2845,2532) ; v1(2797,1222.74) 2797,1516.63 2852,1571.63 2852,1603 2886,1637 2886,2111 2844,2153 v2(2844,2436) ; R44.1 2934.53,951.91 2915.09,951.91 2908,959 2908,1149 ; v2(2941,1223) 2941,1182 2908,1149 ; v1(3133,1641) 3422,1641 3469,1688 3469,1884 3495,1910 U5.7 3607,1860 R46.2 ; v1(3134,1536) 3047,1536 2908,1397 2908,1149
  Bottom Layer w10: v2(293,2961) 293,2888 530.44,2650.56 J6.1 ; v2(2209,2878) v1(2209,3028) ; v1(2797,1222.74) 2797.13,1222.87 2940.87,1222.87 v2(2941,1223) ; v2(2844,2436) 2844.5,2436.5 2844.5,2531.5 v1(2845,2532) ; v1(3133,1641) 3133.5,1640.5 3133.5,1536.5 v1(3134,1536)
  other v1: 2941,1223 2844,2436 2209,2878 293,2961
  other v2: 2797,1222.74 3134,1536 3133,1641 2845,2532 2209,3028
CAN_BMSS_L: J6.2 R40.1 R42.1 U5.6 | length 8177.7
  Top Layer w10: v1(546,3132) 577,3132 589,3120 1277,3120 1366,3031 2145,3031 2190,3076 2227,3076 2297,3006 3460,3006 3699,2767 3699,2453 3977,2175 4153,2175 4323,2005 4323,1968 4278,1923 v2(4278,1597) ; R42.1 2902,902 2892,912 2892,1413 3053,1574 3523,1574 3608,1659 ; U5.6 3605,1762 3627,1762 ; R40.1 3627,1762 ; v1(3673,1596) 3671,1596 3608,1659 ; 3608,1659 3608,1743 3627,1762
  Bottom Layer w10: J6.2 582,2236.75 582,2343 561,2364 561,2676 582,2697 582,2753 546,2789 v1(546,3132) ; v1(3673,1596) 3673.5,1596.5 4277.5,1596.5 v2(4278,1597)
  other v1: 4278,1597
  other v2: 3673,1596 546,3132
CAN_MUX_RX: U1.61 U4.4 | length 3818
  Top Layer w10: U4.4 412.81,320.52 370.86,320.52 365,314.67 365,303 380,288 409,288 v1(434,263) ; v1(2280,2284) v2(2460,2284)
  Bottom Layer w10: v1(434,263) 609,263 950.52,604.52 1435.52,604.52 2090,1259 2090,1630 2460,2000 v2(2460,2284) ; U1.61 2191.28,2284 v1(2280,2284)
  other v1: 2460,2284
  other v2: 434,263 2280,2284
CAN_MUX_TX: R16.2 U1.60 U4.1 | length 5356.1
  Top Layer w10: R16.2 293,416.56 293,433.14 298.86,439 ; U4.1 364.86,398.77 359,404.63 359,431 351,439 298.86,439 ; v1(2262,2358) 2104,2516 1745,2516 1257,3004 418,3004 64,2650 64,673.86 298.86,439
  Bottom Layer w10: U1.60 2237.44,2358 v1(2262,2358)
  other v2: 2262,2358
CAN_MUXED_H: J5.1 R43.1 R45.2 U4.7 | length 2734.2
  Top Layer w10: R43.1 926.22,344.57 925.88,344.91 925.88,371.12 921.44,375.56 R45.2 804,392 785.18,373.18 U4.7 681.73,373.45 641.95,373.45 636.41,379 636,379 626,389 626,482 657,513 871,513 974,616 v1(974,923) ; J5.1 961,2290 897,2290 868,2261 868,2031 932,1967 932,1866 859,1793 859,1566 999,1426 999,1326 974,1301 v2(974,1075)
  Bottom Layer w10: v1(974,923) v2(974,1075)
  other v1: 974,1075
  other v2: 974,923
CAN_MUXED_L: J5.2 R39.1 R41.1 U4.6 | length 2828.5
  Top Layer w10: R41.1 R39.1 826,279 757.41,347.59 U4.6 634.41,347.59 597,385 597,483 648,534 862,534 950,622 950,678 927,701 v1(927,831) ; J5.2 908,2188 889,2169 889,2045 954,1980 954,1857 878,1781 878,1576 1022,1432 1022,1322 1003,1303 1003,1119 1057,1065 v2(1057,861)
  Bottom Layer w10: v1(927,831) 957,861 v2(1057,861)
  other v1: 1057,861
  other v2: 927,831
ChrgLED: Q2.3 R14.1 U1.29 | length 2014.5
  Top Layer w10: R14.1 460,2627 471.4,2615.6 ; Q2.3 471.4,2615.6 ; v1(734.98,2372.5) 709.5,2372.5 578,2504 578,2614 567,2625 480.81,2625 471.4,2615.6 ; v2(1151,2305) 1151,2268 1136,2253 1136,1966 1180,1922 1423,1922 1472,1873 1472,1845.29 1498.29,1819 v1(1501,1819)
  Bottom Layer w10: v1(734.98,2372.5) 1083.5,2372.5 v2(1151,2305) ; v1(1501,1819) 1552,1870 1552,1896 1589.45,1933.45 1590.18,1933.45 U1.29
  other v1: 1151,2305
  other v2: 1501,1819 734.98,2372.5
ChrgLED_OUT: J6.6 Q2.1 | length 242.8
  Top Layer w10: J6.6@330.47,2285.22 330.47,2336.61 343.86,2350 406,2350 434,2378 Q2.1
FluidHeater: Q7.3 R26.1 U1.30 | length 5092.5
  Top Layer w10: v2(1421,1846) 1421,1548 1434,1535 1434,1428 1528,1334 1750,1334 1926,1158 2278,1158 2459,977 2603,977 2618,992 2706.5,992 2721.5,977 2809,977 2858,1026 2858,1529 v2(2912,1583) ; v1(3054,1444) 3054,1446 3078,1470 3178,1470 3261,1553 3692,1553 3798,1659 3798,1732 3808,1742 ; R26.1 3619,1955 3613,1961 3613,1976 3620,1983 4021,1983 4037,1967 4037,1756 4023,1742 3808,1742 ; Q7.3 3807.94,1804.94 3797,1794 3797,1753 3808,1742
  Bottom Layer w10: v2(1421,1846) 1474.89,1846 U1.30 ; v2(2912,1583) 2913.5,1583 3052.5,1444 v1(3054,1444)
  other v1: 2912,1583 1421,1846
  other v2: 3054,1444
FluidHeater_OUT: J5.6 Q7.1 | length 5576.2
  Top Layer w10: J5.6 766,2291 766,2350 796,2380 990,2380 1052,2318 1052,1599 1118,1533 1118,1486 1154,1450 1359,1450 1509.5,1299.5 1726.5,1299.5 1795,1231 1795,1203 v2(1824,1174) ; v1(1891,1243) 1951,1183 2284,1183 2471.19,995.81 2589.81,995.81 2607,1013 2718,1013 2734,997 2806.37,997 2839,1029.63 2839,1536 2870,1567 2870,1590 2913,1633 v2(2913,2159) ; v1(3758,1907) 3760.71,1907 3776.76,1923.05 Q7.1
  Bottom Layer w10: v2(1824,1174) 1824,1175 1891,1242 v1(1891,1243) ; v2(2913,2159) 2914,2158 3600,2158 3631,2127 3631,1961 3685,1907 v1(3758,1907)
  other v1: 1824,1174 2913,2159
  other v2: 1891,1243 3758,1907
GND: C1.2 C2.2 C3.2 C4.2 C5.1 C6.2 C7.2 C8.1 C9.1 C10.2 C11.2 C12.2 C13.2 C14.2 C15.2 C16.2 C17.2 C18.2 C19.2 C20.2 C21.2 C22.2 C23.1 C24.1 D4.1 D5.1 D6.1 D7.1 D11.1 D12.1 D13.1 D14.1 J1.14 J2.12 J2.14 J3.1 J4.1 J7.3 LED1.2 Q1.2 Q2.2 Q3.2 Q4.2 Q5.2 Q6.2 Q7.2 R7.1 R11.2 R14.2 R15.2 R18.2 R19.2 R20.2 R26.2 R31.2 R32.2 R39.2 R40.2 R45.1 R46.1 S1.1 U1.9 U1.20 U1.25 U1.41 U1.56 U2.4 U3.2 U4.2 U5.2 | length 6249.8
  Top Layer w10: D4.1 200,791 298,889 ; R15.2 v1(200,1960) 309.18,1960 J3.1 ; v1(214,2364) 261,2364 281.4,2384.4 Q3.2 ; C9.1 298,934.22 298,889 ; C17.2 331.75,280.25 v5(365,247) 386,226 452,226 486,260 486,350 462.82,373.18 U4.2 ; Q2.2 397,2541.66 397,2584.14 391.14,2590 385.86,2590 380,2595.86 380,2621.14 385.86,2627 ; R14.2 385.86,2627 ; U2.4 302,885 298,889 ; v1(529,2726) 529,2727.5 487.5,2769 ; C20.2 602,2769 ; C21.2 598,2871 587,2860 587,2784 602,2769 ; C15.2 700.69,1954.09 756.91,1954.09 v1(758,1953) ; Q1.2@755.94,1356 846.5,1356 848.5,1358 v5(950,1358) ; R7.1 795,830 805,840 805,862 v5(835,892) ; C6.2 790,1054 840,1054 v5(900,1114) ; v1(855,336) 876.68,314.32 934.68,314.32 954.44,294.56 R39.2 ; C23.1 925.97,141.09 925.94,91.06 v5(927,90) ; R45.1 949,411 953.44,415.44 R31.2 986,433 v5(1013,460) ; R11.2 1226,1176 1235,1167 1306.67,1167 S1.1 ; C14.2 1282.78,428.22 1288,423 C12.2 1318,402 1351,369 C5.1 1327.22,319.78 v1(1297,350) ; v1(1445,242) 1473.91,270.91 1574.91,270.91 1588,284 C7.2 ; v1(1541,627) 1541,582 1550.09,572.91 1570.53,572.91 LED1.2 ; U3.2 1810.09,508.09 1810.09,650.09 C8.1 ; C24.1 2761.91,840.59 2782.14,840.59 ; R19.2 2762.21,687.91 2780.91,687.91 ; C16.2 2782.14,738.5 ; C18.2 2762.21,789.09 2780.91,789.09 ; C22.2 2782.14,893 2788,887.14 2788,846.45 2782.14,840.59 ; Q5.2 2795,673.81 ; R18.2 2908,684 ; C19.2 2904.86,791 2899,785.14 2899,746 2908,737 ; R32.2 2908,737 ; v1(3129,435) C13.2 ; Q4.2@3140.87,745.06 3231.43,745.06 3232.48,744 v1(3340,744) ; v1(3488,2310) 3488,2418 Q6.2 ; R46.1 3699,1860 ; R40.2 3703,1762 ; R26.2 3698,1955 3709,1944 3709,1870 3699,1860 ; v1(3709,1700) 3709,1756 3703,1762 ; Q7.2@3856.01,1864 3765,1864 3710,1809 ; 385.86,2627 361,2651.86 361,2716 414,2769 487.5,2769 ; 487.5,2769 602,2769 ; 2780.91,687.91 2795,673.81 ; 2780.91,687.91 2788,695 2788,732.64 2782.14,738.5 ; 2780.91,789.09 2788,796.19 2788,834.74 2782.14,840.59 ; 2780.91,789.09 2788,782 2788,744.36 2782.14,738.5 ; 2795,673.81 2805.19,684 2908,684 ; 2908,684 2902,690 2902,731 2908,737 ; 3699,1860 3710,1849 3710,1809 ; 3703,1762 3710,1769 3710,1809
  Bottom Layer w10: v2(1261,1859) 1261,1822 1270,1813 ; C4.2 1290.53,1688.91 1272.95,1688.91 ; C3.2 1290.53,1730.57 1271.29,1730.57 ; C1.2 1290.77,1772 1269,1772 ; C2.2 1270,1813 ; R20.2 1291.31,1649.91 1272.95,1649.91 1263,1659.86 1263,1678.95 1272.95,1688.91 ; U1.25 1744.08,1976 1766,1976 v2(1805,1937) 1805,1898.21 1774.13,1867.35 U1.20 ; U1.41 v2(1774.96,2189) ; v2(1939,2193) 1940.91,2194.91 1962.99,2194.91 U1.56 ; v2(1971,1991) 1971,1965.08 U1.9 ; C10.2 2049.33,1007.11 2049.33,1026.33 2062,1039 v2(2149,1039) 2236,1039 2248,1027 C11.2 ; 1269,1772 1262,1765 1262,1739.86 1271.29,1730.57 ; 1269,1772 1262,1779 1262,1805 1270,1813 ; 1271.29,1730.57 1262,1721.29 1262,1699.86 1272.95,1688.91
GPIOC13: J2.3 U1.47 | length 837.2
  Bottom Layer w10: U1.47 1801.97,2329.47 1778.11,2353.34 1778.11,2773.11 1911,2906 1911,3097 J2.3
GPIOC14: J2.1 U1.48 | length 856.5
  Bottom Layer w10: U1.48 1795.01,2363.78 1795.01,2761.01 2014,2980 J2.1
GPIOD0: J2.5 U1.46 | length 825.2
  Bottom Layer w10: U1.46 1752.39,2350.73 1752.39,2839.39 1814,2901 J2.5
GPIOD1: J1.13 U1.49 | length 961.7
  Bottom Layer w10: U1.49 2409.98,2836.77 J1.13
GPIOD2: J1.11 U1.50 | length 1011.2
  Bottom Layer w10: U1.50 2509.98,2908.93 J1.11
GPIOD3: J1.9 U1.51 | length 1060.8
  Bottom Layer w10: U1.51 2609.98,2981.09 J1.9
GPIOD4: J1.7 U1.52 | length 1110.4
  Bottom Layer w10: U1.52 2709.98,3053.25 J1.7
GPIOD5: J1.5 U1.53 | length 1205.9
  Bottom Layer w10: U1.53 2689.56,3005 2768,3005 2801.61,3038.61 2801.61,3091.64 J1.5
GPIOD6: J1.3 U1.54 | length 1310.6
  Bottom Layer w10: U1.54 2691.4,2979 2864,2979 2909.98,3024.98 J1.3
GPIOD7: J1.1 U1.55 | length 1415.4
  Bottom Layer w10: U1.55 2693.24,2953 2960,2953 3009,3002 3009,3099.02 J1.1
GPIOD8: J2.13 U1.42 | length 972.5
  Bottom Layer w10: J2.13 1414,2577.76 U1.42
GPIOD9: J2.11 U1.43 | length 922.9
  Bottom Layer w10: J2.11 1514,2505.6 U1.43
GPIOD10: J2.9 U1.44 | length 873.3
  Bottom Layer w10: J2.9 1614,2433.44 U1.44
GPIOD11: J2.7 U1.45 | length 823.8
  Bottom Layer w10: J2.7 1714,2361.27 U1.45
GROUND: D1.1 J5.4 J6.4 Q1.1 | length 1759.1
  Top Layer w10: Q1.1 643.79,1415.06 594.62,1464.22 473.94,1464.22 D1.1 470,1614 519,1663 728,1663 837,1772 837,1806 909,1878 909,1942 J5.4
  Bottom Layer w10: J6.4 341.49,2074.14 381.86,2074.14 420,2036 711,2036 J5.4
ILUM: J3.4 Q3.3 R15.1 | length 1449.9
  Top Layer w10: R15.1 200,1833.86 194.14,1828 158,1828 137,1849 137,2047 ; Q3.3 206.6,2414.6 199,2407 157,2407 137,2387 137,2047 ; J3.4 596.52,1869.52 610,1883 610,2012 600,2022 162,2022 137,2047
IMP: C15.1 R12.2 R13.2 U1.11 | length 1949
  Top Layer w10: R12.2 648,1866 ; R13.2 669.53,1764.91 654.95,1764.91 641,1778.86 641,1828 ; C15.1 649,1955 641,1947 641,1873 648,1866 ; v2(690,1810) 659,1810 641,1828 ; 641,1828 641,1859 648,1866
  Bottom Layer w10: v2(690,1810) 860,1640 978,1640 1143,1475 1490,1475 1933.56,1918.56 1961.35,1918.56 1985.22,1894.7 U1.11
  other v1: 690,1810
IMP_IN: J3.3 R13.1 | length 711
  Top Layer w10: J3.3 250.97,1778.97 228,1756 228,1720 242,1706 712,1706 732,1726 732,1754 722,1764 R13.1
IsFHerror: C22.1 R30.2 R38.2 U1.32 | length 4417.7
  Top Layer w10: v1(1181,1976) 1181,1978 1157,2002 1157,2236 1186,2265 1186,2332 1138,2380 1138,2415 1159,2436 1456,2436 1476,2456 1956,2456 2206,2206 2706,2206 2824,2088 2824,1671 2705,1552 2705,1494.37 2738,1461.37 2738,1207.5 2784,1161.5 2784,1094 2738,1048 v2(2659,1048) ; R30.2 2689,893 ; v1(2658,935) 2658,932.29 2667,923.29 2667,915 2689,893 ; C22.1 2689,893
  Bottom Layer w10: v1(1181,1976) 1411,1976 ; R38.2 1380,1945 1411,1976 ; U1.32 1549.21,1976 1411,1976 ; v1(2658,935) 2658.5,935.5 2658.5,1047.5 v2(2659,1048)
  other v1: 2659,1048
  other v2: 2658,935 1181,1976
IsFHerror_IN: J5.5 R38.1 | length 730.7
  Bottom Layer w10: J5.5 826,2188 842,2172 842,2005 902,1945 R38.1
IsHeating: C16.1 R24.2 R25.2 U1.31 | length 3660.7
  Top Layer w10: v1(1008,1992) 1029,1971 1029,1593 1095,1527 1095,1486.37 1147.37,1434 1350,1434 1500.5,1283.5 1590.25,1283.5 1806.75,1067 1869,1067 1941,995 1941,901 1916,876 v2(1916,838) ; v2(1191,2046) 1223,2014 1223,1962 1241,1944 1455,1944 v1(1473,1926) ; v1(2036,798) 2036.5,798.5 2318.5,798.5 v2(2319,799) ; v1(2454,802) 2583,802 2646,739 ; R24.2 2646,739 ; C16.1 2700.34,738.5 2699.84,739 2646,739
  Bottom Layer w10: v1(1008,1992) 1062,2046 v2(1191,2046) ; R25.2 1366,1917 1404,1879 1480.05,1879 1526.52,1925.48 ; v1(1473,1926) 1526,1926 1526.52,1925.48 ; U1.31 1526.52,1925.48 ; v2(1916,838) 1956,798 v1(2036,798) ; v2(2319,799) 2320.5,800.5 2452.5,800.5 v1(2454,802)
  other v1: 2319,799 1916,838 1191,2046
  other v2: 2036,798 2454,802 1473,1926 1008,1992
IsHeating_IN: J6.5 R25.1 | length 1107
  Top Layer w10: J6.5 380.63,2135 587,2135 653,2069 653,2046 669,2030 783,2030 870,1943 v2(870,1916)
  Bottom Layer w10: v2(870,1916) 870.5,1916.5 1295.72,1916.5 R25.1
  other v1: 870,1916
LightD: Q4.3 R18.1 U1.24 | length 3215.1
  Top Layer w10: v1(1460,1654) 1457.29,1654 1439,1635.71 1439,1556 1451,1544 1451,1433.63 1534.31,1350.31 1756.31,1350.31 1787.81,1318.81 1813.19,1318.81 v2(1837,1295) ; v1(1757,1216) 1757,1191 1829,1119 2249,1119 2392,976 2392,733 2460,665 2460,558 2521,497 2809,497 2853,541 2853,629 2876.21,652.21 2926.73,652.21 2949.94,675.41 2949.94,683.09 2950.84,684 R18.1 3094.38,684 3131,684 Q4.3
  Bottom Layer w10: v1(1460,1654) 1460,1698 1503,1741 1536.92,1741 U1.24 ; v1(1757,1216) 1757.5,1216 1836.5,1295 v2(1837,1295)
  other v1: 1837,1295
  other v2: 1757,1216 1460,1654
LightD_OUT: D8.1 J4.6 Q4.1 | length 6745.4
  Top Layer w10: v1(998,3041) 1264,3041 1335,2970 3419,2970 3654,2735 3654,2427 3953.81,2127.19 4121.81,2127.19 4244,2005 4244,1170 v2(4220,1146) ; Q4.1 3094.89,804.11 3079,820 3079,1162 3168,1251 3373.13,1251 D8.1
  Bottom Layer w10: J4.6 998,2834 v1(998,3041) ; D8.1 3375.13,1161.87 3429,1108 4182,1108 v2(4220,1146)
  other v1: 4220,1146
  other v2: 998,3041
LightN: Q5.3 R19.1 U1.27 | length 2682.7
  Top Layer w10: v1(1290,1547) 1519,1318 1733,1318 1912,1139 2271,1139 2417,993 2417,741 2472,686 2687,686 2695,678 ; Q5.3 2695,678 ; R19.1 2704,687 2695,678
  Bottom Layer w10: v1(1290,1547) 1391,1648 1391,1679 1471,1759 1529,1759 1604.97,1834.97 1604.97,1892.97 1676.29,1964.29 U1.27
  other v2: 1290,1547
LightN_OUT: D9.1 J4.7 Q5.1 | length 5040.9
  Top Layer w10: J4.7 1090,2658 1137,2705 1528,2705 1736,2497 1969,2497 2221,2245 2726,2245 2866,2105 2866,1650 2834,1618 2834,1588 v2(2759,1513) ; Q5.1 2895,603 2923,631 3309,631 3476,798 3476,1281.14 3410.14,1347 3071,1347 v1(3013,1405) ; v2(2909,1512) 2909.5,1512 3044.5,1647 D9.1
  Bottom Layer w10: v2(2759,1513) 2759.5,1512.5 2908.5,1512.5 v2(2909,1512) 2909,1510.5 3013,1406.5 v1(3013,1405)
  other v1: 2909,1512 2759,1513
  other v2: 3013,1405
LightR: R20.1 U1.28 | length 520.9
  Bottom Layer w10: R20.1 1357,1649 1367,1659 1367,1682.44 1465,1780.44 1512.44,1780.44 1583,1851 1583,1898.44 U1.28
LightR_OUT: D10.1 J4.8 Q6.1 | length 3093.3
  Top Layer w10: J4.8 922,2503 946,2479 1443,2479 v2(1567,2603) ; v1(1568,2798) 1683.28,2913.28 3068.51,2913.28 D10.1 ; D10.1@3214.55,2779.79 3251.76,2817 3468,2817 3489,2796 Q6.1 ; D10.1 3214,2779.79 D10.1
  Bottom Layer w10: v2(1567,2603) 1567.5,2603.5 1567.5,2797.5 v1(1568,2798)
  other v1: 1567,2603
  other v2: 1568,2798
MCLR: J7.1 R2.1 U1.7 | length 2177.9
  Top Layer w10: v1(1997,1049) 1957,1009 1957,829 2037,749 2177,749 2214,712 R2.1 2214.78,667 2237,667 2247,657 2247,287 2289,245 J7.1 ; v2(2106,1870) 2106,1824 2171,1759 2171,1306 2198,1279 v1(2198,1217)
  Bottom Layer w10: v1(1997,1049) 2164.09,1216.09 2197.09,1216.09 v1(2198,1217) ; U1.7 2104.09,1887.67 2104.09,1871.91 v2(2106,1870)
  other v1: 2106,1870
  other v2: 1997,1049 2198,1217
NetC8_2: C8.2 D3.1 R5.1 S1.2 U3.3 | length 847
  Top Layer w10: S1.2 1567,739.67 ; D3.1 1588,760.67 1567,739.67 ; U3.3 1709,637 ; R5.1 1811.91,677.56 1811,678.47 C8.2 1810.56,679 1751,679 1709,637 ; 1567,739.67 1675.33,739.67 1709,706 1709,637
NetC9_2: C9.2 U2.3 | length 108.7
  Top Layer w10: C9.2 U2.3
NetC10_1: C10.1 U1.39 Y1.2 | length 2955.8
  Top Layer w10: v2(1484,2340) 1238,2340 1204,2306 1204,2083 1256,2031 1426,2031 1574,1883 1574,1488 1620,1442 1673,1442 1719,1396 1823,1396 1947,1272 v2(1947,1236) ; v1(1763,1059) 1792.12,1059 1801.12,1050 1862,1050 1925,987 1925,907.63 1917,899.63 1893.63,899.63 v2(1892,898)
  Bottom Layer w10: v2(1484,2340) 1584.14,2340 1614,2310.14 1614,2294.24 U1.39 ; v1(1763,1059) 1938.09,1234.09 1945.09,1234.09 v2(1947,1236) ; v2(1892,898) 1894.71,898 1910.71,882 Y1.2 2048,974.28 2049,975.28 C10.1
  other v1: 1892,898 1947,1236 1484,2340
  other v2: 1763,1059
NetC11_1: C11.1 U1.40 Y1.1 | length 3396
  Top Layer w10: v2(1248,2298) 1221,2271 1221,2094 1263,2052 1432,2052 1590,1894 1590,1494.63 1623.81,1460.81 1688.19,1460.81 1736,1413 1848,1413 2005,1256 v2(2005,1227) ; v1(1250,2387) 1251.5,2388.5 1438.5,2388.5 v2(1440,2390) ; v1(1797,1015) 1826,986 1866,986 v2(1889,963)
  Bottom Layer w10: v2(1248,2298) 1249,2299 1249,2386 v1(1250,2387) ; v2(1440,2390) 1482,2390 1514,2358 1593,2358 1632,2319 1632,2304.08 U1.40 ; v1(1797,1015) 1797,1017 2005,1225 v2(2005,1227) ; v2(1889,963) 1854,928 1854,848 1937,765 2219,765 2248,794 Y1.1 C11.1
  other v1: 1889,963 2005,1227 1248,2298 1440,2390
  other v2: 1797,1015 1250,2387
NetC23_2: C23.2 R33.2 R41.2 R43.2 | length 238.5
  Top Layer w10: R43.2 954.69,343.09 969.62,343.09 978,334.71 978,242 968.91,232.91 955.35,232.91 R41.2 R33.2 C23.2
NetC24_2: C24.2 R34.2 R42.2 R44.2 | length 1243.3
  Top Layer w10: C24.2 2464.5,841.5 2433,873 2433,922 2463,952 2613,952 2633,972 2692,972 2712,952 2757,952 2813,896 2813,835 2827,821 2983,821 2991,829 2991,843 2985,849 ; R42.2 2984,902 ; R34.2 2985,849 ; R44.2 2985,951 2991,945 2991,909 2984,902 ; 2984,902 2991,895 2991,855 2985,849
NetD4_2: D4.2 L1.1 U2.2 | length 850.6
  Top Layer w10: L1.1 363,993 371,985 U2.2 508,985 525,968 525,813 569,769 854,769 900,723 D4.2
NetD8_2: D8.2 R21.2 | length 653.6
  Top Layer w10: D8.2 4116.87,1319.87 4209,1412 4209,1752 4153,1808 R21.2
NetD9_2: D9.2 R22.2 | length 1367.4
  Top Layer w10: D9.2 3090,2092 4109.63,2092 4162,2039.63 4162,1880.38 4143.62,1862 R22.2
NetD10_2: D10.2 R23.2 | length 1326.1
  Top Layer w10: D10.2 3202,2296 3287,2211 3776,2211 v2(3822,2165) ; v1(3825,2071) 3826,2072 4107,2072 4146,2033 4146,1927.86 4140.14,1922 R23.2
  Bottom Layer w10: v2(3822,2165) 3823.5,2163.5 3823.5,2072.5 v1(3825,2071)
  other v1: 3822,2165
  other v2: 3825,2071
NetLED1_1: LED1.1 R4.2 | length 90.8
  Top Layer w10: R4.2 1585,535.75 1599,549.75 LED1.1
NetLED2_2: LED2.2 R10.1 | length 73.9
  Bottom Layer w10: R10.1 1534.32,2273.91 1523.09,2273.91 1513.09,2283.91 1513.09,2306.24 1518.95,2312.09 1534.31,2312.09 LED2.2
NetLED3_2: LED3.2 R11.1 | length 133.9
  Top Layer w10: LED3.2 1136.91,1228.47 1136.91,1245.91 1144,1253 1220,1253 1226,1247 R11.1
NetLED4_2: LED4.2 R16.1 | length 62.9
  Top Layer w10: R16.1 320,391 331.75,379.25 LED4.2
NetLED5_2: LED5.2 R17.1 | length 63.2
  Top Layer w10: R17.1 LED5.2
NetQ1_3: Q1.3 R3.2 | length 88.9
  Top Layer w10: R3.2 699,1289 706.94,1296.94 Q1.3
NetQ3_1: Q3.1 R21.1 R22.1 R23.1 | length 5599.5
  Top Layer w10: Q3.1 245,2546 245,2698 v2(246,2699) ; v1(247,2898) 289.37,2898 468.37,3077 1260,3077 1349,2988 3440,2988 3677,2751 3677,2439 3964,2152 4137,2152 4284,2005 v2(4284,1987) ; R23.1 4064,1922 ; R22.1 4065,1862 ; R21.1 4063.86,1808 4058,1813.86 4058,1855 4065,1862 ; v1(4111,1987) 4077,1987 4056,1966 4056,1930 4064,1922 ; 4064,1922 4057,1915 4057,1870 4065,1862
  Bottom Layer w10: v2(246,2699) 246.5,2699.5 246.5,2897.5 v1(247,2898) ; v1(4111,1987) v2(4284,1987)
  other v1: 4284,1987 246,2699
  other v2: 4111,1987 247,2898
NetR6_2: R6.2 R7.2 U2.5 | length 280.8
  Top Layer w10: U2.5 691,885 704,872 704,845 718.09,830.91 738.09,830.91 R7.2 739.31,830 740.22,830.91 R6.2
NetR8_1: R8.1 U2.1 U2.7 U2.8 | length 126.9
  Top Layer w10: R8.1 356,1060 381,1035 U2.1
NetR9_2: R9.2 U1.8 | length 1596.6
  Top Layer w10: R9.2 1611,687 1629,705 1660,705 v1(1661,704) ; v1(2049,1854) 2154,1749 v1(2154,1267)
  Bottom Layer w10: v1(1661,704) 1731,774 1731,864 2134,1267 v1(2154,1267) ; U1.8 2068,1895.92 2068,1873 v1(2049,1854)
  other v2: 1661,704 2154,1267 2049,1854
NetR10_2: R10.2 U1.37 | length 134.5
  Bottom Layer w10: R10.2 1562.87,2272.91 1579.65,2272.91 U1.37
NetR31_1: R31.1 U4.8 | length 258.1
  Top Layer w10: U4.8 779.77,398.77 814,433 R31.1
NetR32_1: R32.1 U5.8 | length 1847.1
  Top Layer w10: R32.1 2995,737 3036,778 3036,987 3019,1004 2987.86,1004 2982,1009.86 2982,1071 2973,1080 2973,1249 2960,1262 2943,1262 2929,1276 2929,1371 3051,1493 3147,1493 v1(3188,1534) ; v1(3186,1673) 3186,1718 3220,1752 3370,1752 3443,1825 3443,1962 3491,2010 U5.8
  Bottom Layer w10: v1(3186,1673) 3187,1672 3187,1535 v1(3188,1534)
  other v2: 3188,1534 3186,1673
NetR33_1: R33.1 U4.5 | length 302
  Top Layer w10: U4.5 683,321 745,321 882,184 R33.1
NetR34_1: R34.1 U5.5 | length 1457.9
  Top Layer w10: R34.1 2909,849 2876,882 2876,1431 3051.5,1606.5 3520.5,1606.5 3557,1643 U5.5
PGC: J7.5 U1.17 | length 2020
  Top Layer w10: v2(1531,1562) 1531,1514 1489,1472 1489,1446.63 1552.63,1383 1634,1383 v2(1654,1403) ; v1(1656,1265) 1656.37,1264.63 1656.37,1240 1811.37,1085 2226,1085 2353,958 2353,727 2345,719 J7.5
  Bottom Layer w10: v2(1531,1562) 1532.91,1563.91 1554.7,1563.91 U1.17 ; v2(1654,1403) 1655,1402 1655,1266 v1(1656,1265)
  other v1: 1654,1403 1531,1562
  other v2: 1656,1265
PGD: J7.4 U1.18 | length 2427.3
  Top Layer w10: v1(1490,1525) 1490,1523 1467,1500 1467,1446 1546,1367 1762.25,1367 1775.25,1354 v2(1817,1354) ; v1(1714,1250) 1714,1205 1818,1101 2235,1101 2372,964 2372,724 2440,656 2440,557 2428,545 J7.4
  Bottom Layer w10: v1(1490,1525) 1490,1566 1527,1603 1565.95,1603 U1.18 ; v1(1714,1250) 1714,1250.5 1817,1353.5 v2(1817,1354)
  other v1: 1817,1354
  other v2: 1714,1250 1490,1525
RESET: C5.2 D2.1 R1.2 R2.2 U3.1 | length 1377.4
  Top Layer w10: R1.2 1238,319.87 1238.91,320.78 1263.22,320.78 1291.78,292.22 C5.2 1351,264 1421,194 1780,194 1859,273 1859,365 1909,415 U3.1 1909,573 1960,624 D2.1 2158,624 2175,641 2213.22,641 R2.2
RX: J2.10 U1.34 | length 1520.6
  Bottom Layer w10: J2.10 1544,3270 1367,3270 1346,3249 1346,2423.05 U1.34
TX: J2.8 U1.33 | length 1689.6
  Bottom Layer w10: U1.33 1329,2412.21 1329,3268 1362,3301 1613,3301 J2.8
WDI: R9.1 U3.4 | length 404.8
  Top Layer w10: R9.1 1611,607.98 1636,582.98 1636,322 1651,307 U3.4
pads on no net: Q5.4 Q5.5 Q5.6 Q5.7 Q5.8 U1.1 U1.2 U1.3 U1.4 U1.5 U1.6 U1.35 U1.36 U1.62 U1.63 U1.64 U3.6

## Polygon pours and split planes (outlines as drawn)
+5V on +5V (split plane): 3531.79,3141.79 4473.9,2199.68 4473.9,313.32 4180.68,20.1 386.32,20.1 20.1,386.32 20.1,2797.68 603.32,3380.9 2342,3380.9 2345.92,3381.29 2349.69,3382.43 2353.17,3384.29 2356.21,3386.79 2534.32,3564.9 3108.68,3564.9